# EAGLE board backplane (EAGLE 6.4)
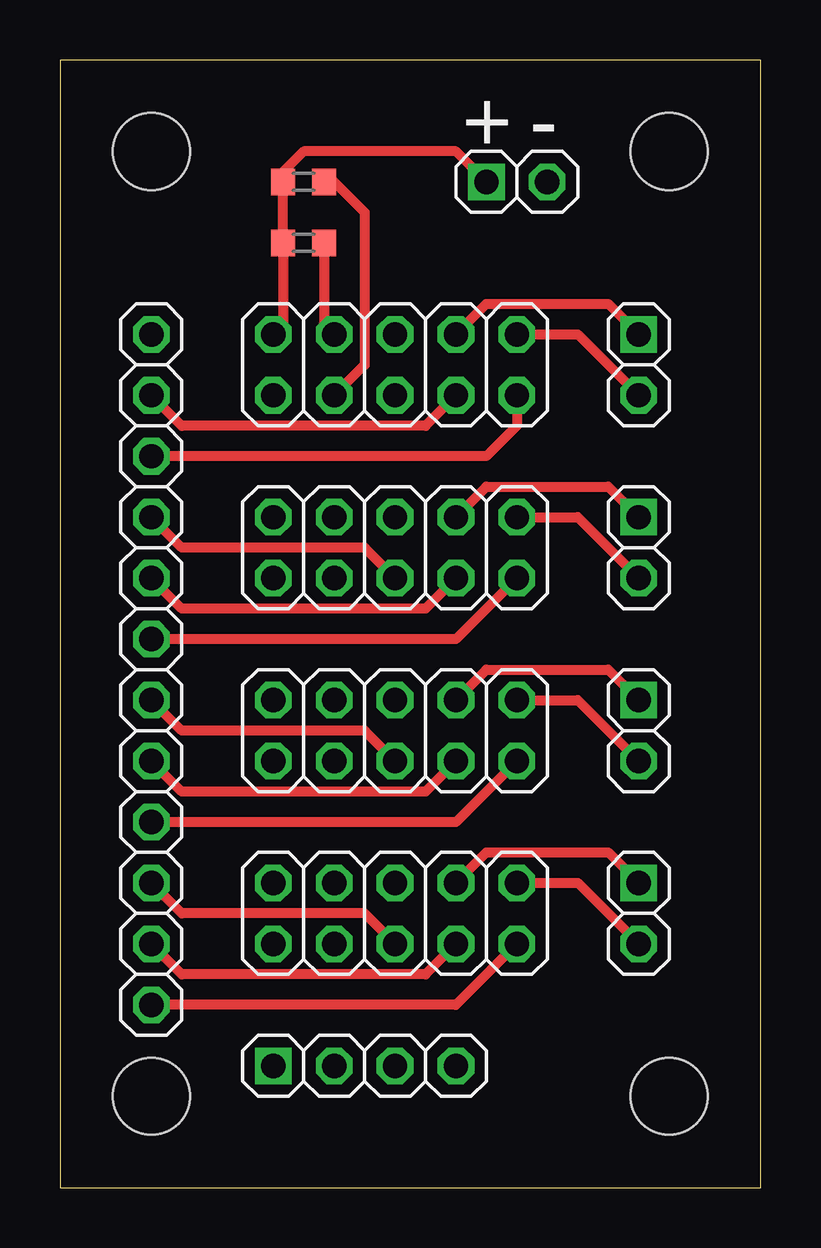
[diagram p0: board, top side]
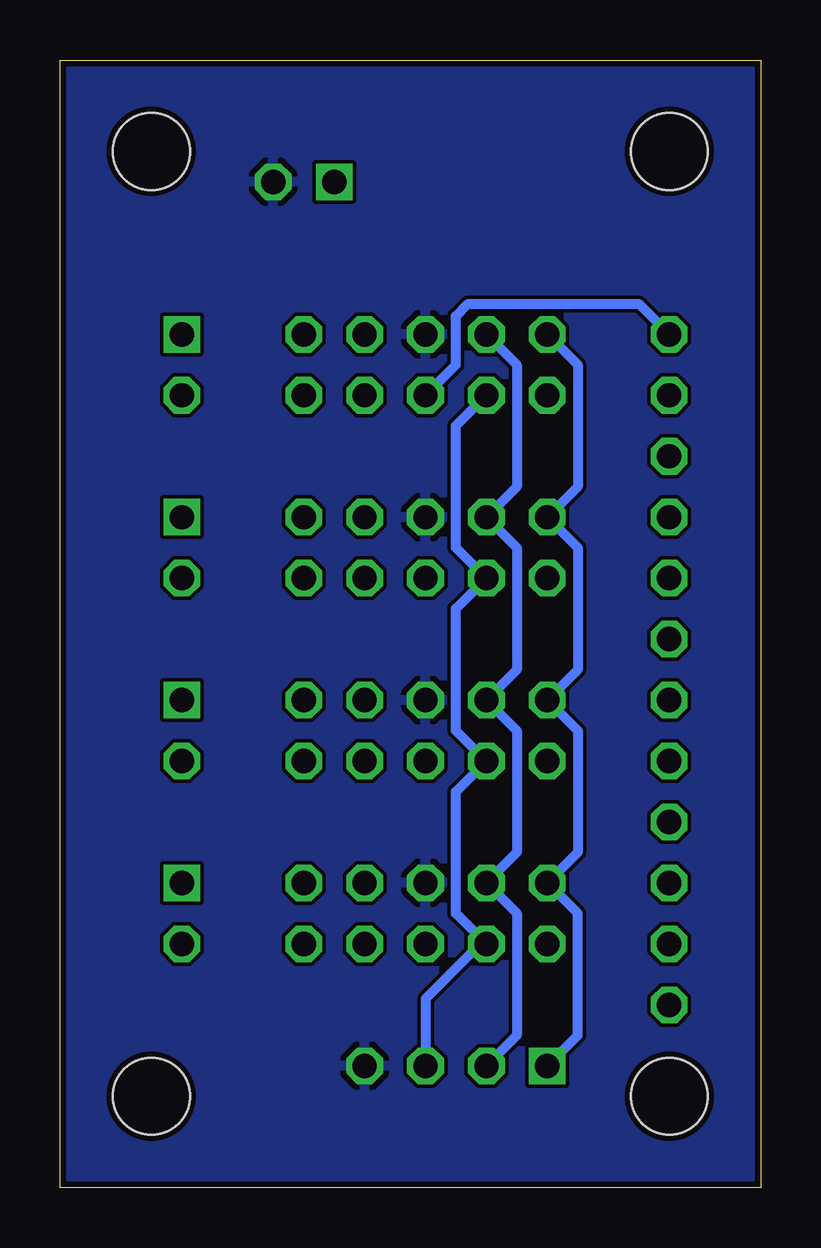
[diagram p1: board, bottom side, seen from below]

Size 29.21 x 46.99 mm. Coordinates in mm from the lower left corner, seen from the top.
Outline: 0,0 29.21,0 29.21,46.99 0,46.99 0,0
Copper layers (1*16): Top 0.0356mm / dielectric 1.5011mm / Bottom 0.0356mm
Design rules "LaenPCBOrder *": minimum track width 6mil, minimum drill 13mil, track to track 6mil, track to pad 6mil, pad to pad 6mil, via to via 6mil, smd to smd 6mil, copper to edge 10mil, drill to drill 6mil, minimum pad ring 7mil, minimum via ring 7mil, stop-mask expansion 4mil, vias tented up to drill 20mil, thermal gap 10mil
Holes 3.2 mm at 3.81,43.18 25.4,43.18 25.4,3.81 3.81,3.81

## Footprints (pad centres in the part's own frame; a part is rotated, then mirrored left to right if it is on the bottom)
2X05 = drill 1.016 octagon: 1 -5.08,-1.27; 2 -5.08,1.27; 3 -2.54,-1.27; 4 -2.54,1.27; 5 0,-1.27; 6 0,1.27; 7 2.54,-1.27; 8 2.54,1.27; 9 5.08,-1.27; 10 5.08,1.27
1X02-S = drill 1.016 square: 1 -1.27,0 | drill 1.016 octagon: 2 1.27,0
1X03-S = drill 1.016 octagon: 1 -2.54,0; 2 0,0; 3 2.54,0
1X04-S = drill 1.016 square: 1 -3.81,0 | drill 1.016 octagon: 2 -1.27,0; 3 1.27,0; 4 3.81,0
R0603 = smd 1 x 1.1: 1 -0.85,0; 2 0.85,0

## Placement (x,y rotation side)
JP1  [2X05]  13.97,11.43 0 top
JP2  [2X05]  13.97,19.05 0 top
JP3  [2X05]  13.97,26.67 0 top
JP4  [2X05]  13.97,34.29 0 top
JP5  PWR  [1X02-S]  19.05,41.91 0 top
JP6  [1X02-S]  24.13,11.43 270 top
JP7  [1X02-S]  24.13,19.05 270 top
JP8  [1X02-S]  24.13,26.67 270 top
JP9  [1X02-S]  24.13,34.29 270 top
JP10  [1X03-S]  3.81,10.16 270 top
JP11  [1X03-S]  3.81,17.78 270 top
JP12  [1X03-S]  3.81,25.4 270 top
JP13  [1X03-S]  3.81,33.02 270 top
JP14  I2C  [1X04-S]  12.7,5.08 0 top
R1  4.7k  [R0603]  10.16,41.91 180 top
R2  4.7k  [R0603]  10.16,39.37 0 top

## Library data of the parts
JP1-JP4 = pinhead
JP5-JP14 = pinhead-2
R1 R2 = rcl

## Nets
GND: JP1.6 JP2.6 JP3.6 JP4.6 JP5.2 JP14.4
N$1: JP1.5 JP10.1
N$2: JP1.7 JP10.2
N$3: JP1.9 JP10.3
N$4: JP1.8 JP6.1
N$5: JP2.5 JP11.1
N$6: JP2.7 JP11.2
N$7: JP2.9 JP11.3
N$8: JP3.5 JP12.1
N$9: JP3.7 JP12.2
N$10: JP3.9 JP12.3
N$11: JP4.5 JP13.1
N$12: JP4.7 JP13.2
N$13: JP4.9 JP13.3
N$14: JP1.10 JP6.2
N$15: JP2.8 JP7.1
N$16: JP2.10 JP7.2
N$17: JP3.8 JP8.1
N$18: JP3.10 JP8.2
N$19: JP4.8 JP9.1
N$20: JP4.10 JP9.2
SCL: JP1.3 JP2.3 JP3.3 JP4.3 JP14.3 R1.1
SDA: JP1.4 JP2.4 JP3.4 JP4.4 JP14.2 R2.2
VCC: JP1.2 JP2.2 JP3.2 JP4.2 JP5.1 JP14.1 R1.2 R2.1

## Tracks (layer width: path | path; a pad name or v marks a point on that pad's centre or on a via)
GND
  pour Bottom: 0,0 29.21,0 29.21,46.99 0,46.99
N$1
  Top 0.406: JP1.5 12.7,11.43 5.08,11.43 JP10.1
N$2
  Top 0.406: JP1.7 15.24,8.89 5.08,8.89 JP10.2
N$3
  Top 0.406: JP1.9 16.51,7.62 JP10.3
N$4
  Top 0.406: JP1.8 17.78,13.97 22.86,13.97 JP6.1
N$5
  Top 0.406: JP2.5 12.7,19.05 5.08,19.05 JP11.1
N$6
  Top 0.406: JP2.7 15.24,16.51 5.08,16.51 JP11.2
N$7
  Top 0.406: JP2.9 16.51,15.24 JP11.3
N$8
  Top 0.406: JP3.5 12.7,26.67 5.08,26.67 JP12.1
N$9
  Top 0.406: JP3.7 15.24,24.13 5.08,24.13 JP12.2
N$10
  Top 0.406: JP3.9 16.51,22.86 JP12.3
N$11
  Bottom 0.406: JP4.5 12.7,34.29 12.7,36.32 12.19,36.83 5.08,36.83 JP13.1
N$12
  Top 0.406: JP4.7 15.24,31.75 5.08,31.75 JP13.2
N$13
  Top 0.406: JP4.9 19.05,31.75 17.78,30.48 JP13.3
N$14
  Top 0.406: JP1.10 21.59,12.7 JP6.2
N$15
  Top 0.406: JP2.8 17.78,21.59 22.86,21.59 JP7.1
N$16
  Top 0.406: JP2.10 21.59,20.32 JP7.2
N$17
  Top 0.406: JP3.8 17.78,29.21 22.86,29.21 JP8.1
N$18
  Top 0.406: JP3.10 21.59,27.94 JP8.2
N$19
  Top 0.406: JP4.8 17.78,36.83 22.86,36.83 JP9.1
N$20
  Top 0.406: JP4.10 21.59,35.56 JP9.2
SCL
  Top 0.406: R1.1 11.43,41.91 12.7,40.64 12.7,34.29 JP4.3
  Bottom 0.406: JP14.3 13.97,7.87 11.68,10.16 JP1.3 12.7,11.43 12.7,16.51 JP2.3 12.7,19.05 12.7,24.13 JP3.3 12.7,26.67 12.7,31.75 JP4.3
SDA
  Top 0.406: R2.2 11.01,35.98 JP4.4
  Bottom 0.406: JP4.4 10.16,34.29 10.16,29.21 JP3.4 10.16,26.67 10.16,21.59 JP2.4 10.16,19.05 10.16,13.97 JP1.4 10.16,11.43 10.16,6.35 JP14.2
VCC
  Top 0.406: JP4.2 9.31,35.98 R2.1 R1.2 9.31,42.33 10.16,43.18 16.51,43.18 JP5.1
  Bottom 0.406: JP4.2 7.62,34.29 7.62,29.21 JP3.2 7.62,26.67 7.62,21.59 JP2.2 7.62,19.05 7.62,13.97 JP1.2 7.62,11.43 7.62,6.35 JP14.1

## Text on the board
tNames: + | -